# Altium PCB Tester_REV_0.PcbDoc (part 3 of 3)
Units mm, origin at the board's own origin, x right, y up, seen from the top; angles counter-clockwise.
Board outline 150 x 150 mm, 2 copper layers (Top Layer, Bottom Layer); 109 components, 101 nets, 433 pads, 87 vias.
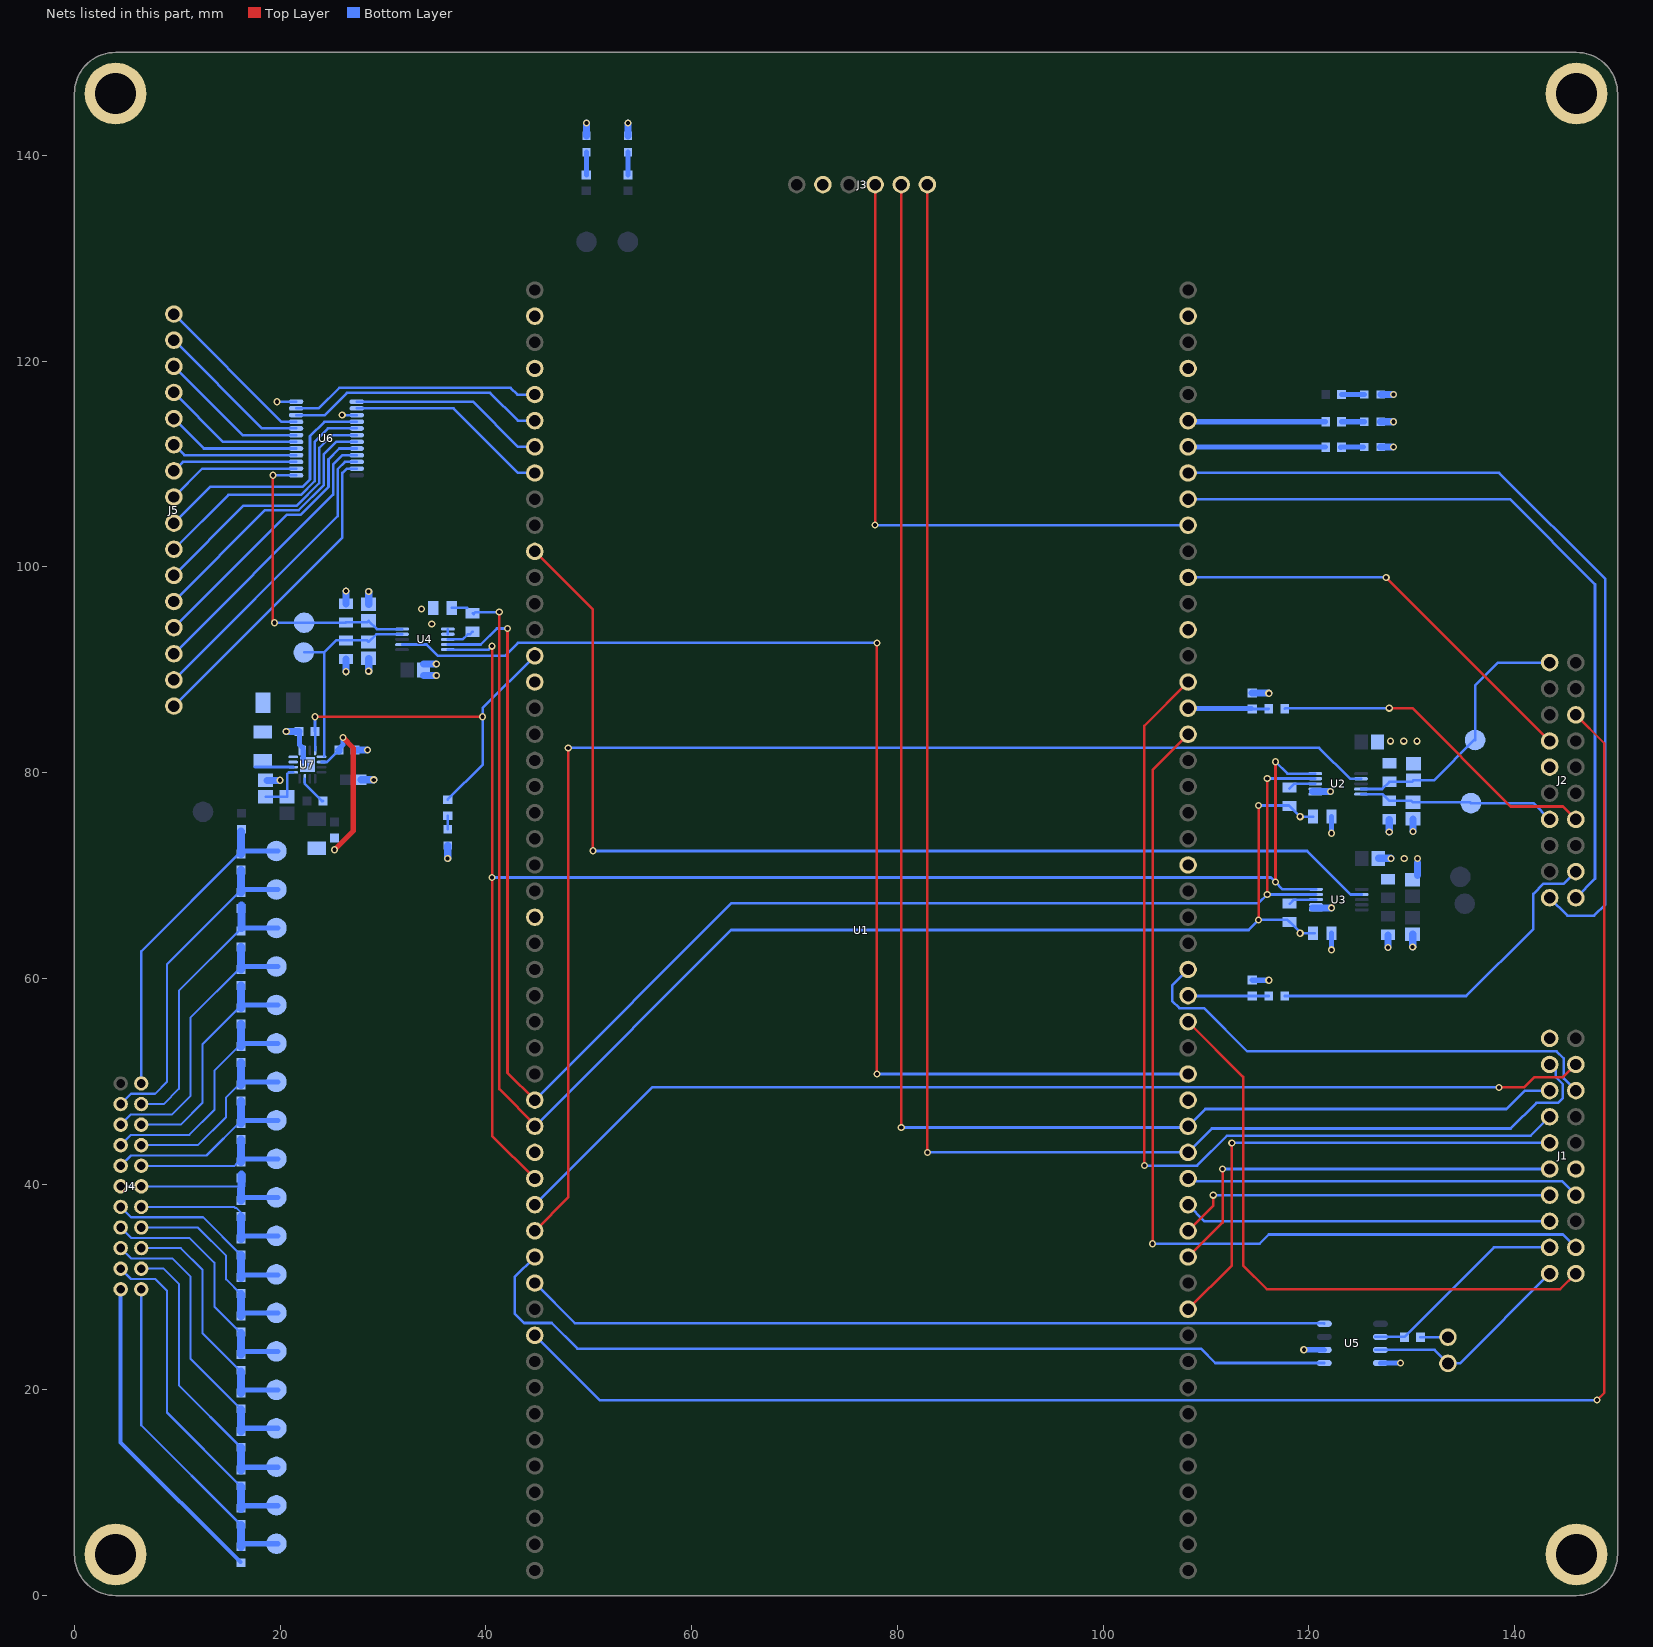
[diagram p2: the nets of this part, all layers, seen from the top]

## Via types
v1: diameter 0.7, hole 0.4, Top Layer to Bottom Layer, 87 vias

## Nets (pads, with @x,y where several pads share a name; then routed paths per layer and width w, separated by ;. In a path a pad name is that pad's centre, name@x,y a point inside that pad or via, vN(x,y) a via of type N, cw(c..) or ccw(c..) an arc to the next point about the centre after c; other vN are vias at no path point) (continued)
BMS_TEMP: C9.2 R16.2 TEMP.1 U4.5 U6.1 | length 32.3
  Top Layer w0.25: v1(19.3,108.895) 19.3,94.724 v1(19.464,94.56)
  Bottom Layer w0.25: v1(19.3,108.895) U6.1@21.55,108.895 ; TEMP.1@22.335,94.56 v1(19.464,94.56) 26.369,94.56 R16.2@26.404,94.595 28.454,94.595 C9.2@28.604,94.745 29.405,93.944 U4.5@31.85,93.944
BMS_VOLT: C8.1 R15.1 U4.4 U7.13 VOLT.1 | length 20.5
  Bottom Layer w0.25: VOLT.1@22.335,91.7 24.3,91.7 ; U7.13@24.3,81.6 24.3,91.7 ; U4.4@31.85,93.444 29.353,93.444 C8.1@28.604,92.695 28.454,92.845 R15.1@26.404,92.845 25.445,92.845 24.3,91.7
BRAKE_LIGHT: R1.2 R3.1 U1.67 | length 7.8
  Bottom Layer w0.25: R1.2@114.479,86.175 116.064,86.175 R3.1@116.089,86.2
  Bottom Layer w0.5: U1.67@108.251,86.24 R1.2@114.415,86.24
BSE: BSE.1 C5.2 J2.14 R12.2 U2.5 | length 19.4
  Bottom Layer w0.25: U2.5@125.062,77.9 127.156,77.9 R12.2@127.807,77.249 129.957,77.249 C5.2@130.107,77.099 135.678,77.099 BSE.1@135.743,77.034 141.813,77.034 J2.14@143.397,75.45
BSPD_FLT: J1.10 U1.79 | length 59.8
  Top Layer w0.25: U1.79@108.251,55.78 113.6,50.431 113.6,32.1 115.921,29.779 144.412,29.779 J1.10@145.937,31.305
BUZZER: R2.2 R4.1 U1.78 | length 7.8
  Bottom Layer w0.25: U1.78@108.251,58.28 R2.2@114.479,58.28 R4.1@116.089,58.28
CAN_H: "120 OHM.1" J1.11 U5.7 | length 21.1
  Bottom Layer w0.25: U5.7@126.444,23.88 132.198,23.88 133.5,22.578 134.671,22.578 J1.11@143.397,31.305
CAN_L: J1.12 R17.1 U5.6 | length 20.6
  Bottom Layer w0.25: U5.6@126.444,25.15 129.279,25.15 137.973,33.845 J1.12@143.397,33.845
CAN_RX: U1.39 U5.4 | length 78.4
  Bottom Layer w0.25: U1.39@44.751,30.38 48.656,26.475 121.494,26.475 U5.4@121.494,26.42
CAN_TX: U1.38 U5.1 | length 87
  Bottom Layer w0.25: U1.38@44.751,32.92 42.8,30.97 42.8,27.4 43.7,26.5 46.4,26.5 48.9,24 109.5,24 110.89,22.61 U5.1@121.494,22.61
CELL1: CELL1.1 J4.1 R40.1 R41.2 | length 32.6
  Bottom Layer w0.25: J4.1@6.5,29.779 6.5,16.56 R40.1@16.2,6.859
  Bottom Layer w0.5: R41.2@16.25,5.04 CELL1.1@19.767,5.04
  Bottom Layer w0.8: R41.2@16.2,4.74 R40.1@16.2,6.859
CELL2: CELL2.1 J4.21 R39.1 R40.2 | length 33.1
  Bottom Layer w0.2: J4.21@4.5,31.779 5.5,30.779 7.844,30.779 9,29.624 9,17.8 R39.1@16.2,10.6
  Bottom Layer w0.5: R40.2@16.25,8.735 CELL2.1@19.767,8.735
  Bottom Layer w0.8: R40.2@16.2,8.435 R40.2@16.2,8.481 R39.1@16.2,10.6
CELL3: CELL3.1 J4.2 R38.1 R39.2 | length 28.4
  Bottom Layer w0.2: J4.2@6.5,31.779 8.677,31.779 10.15,30.306 10.15,20.45 R38.1@16.2,14.4
  Bottom Layer w0.5: R39.2@16.25,12.476 CELL3.1@19.767,12.476
  Bottom Layer w0.8: R39.2@16.2,12.176 R39.2@16.2,12.221 R38.1@16.2,14.4
CELL4: CELL4.1 J4.20 R37.1 R38.2 | length 28.5
  Bottom Layer w0.2: J4.20@4.5,33.779 5.5,32.779 9.509,32.779 11.3,30.989 11.3,23 R37.1@16.2,18.1
  Bottom Layer w0.5: R38.2@16.25,16.262 CELL4.1@19.767,16.262
  Bottom Layer w0.8: R38.2@16.2,15.962 R37.1@16.2,18.1
CELL5: CELL5.1 J4.3 R36.1 R37.2 | length 23.9
  Bottom Layer w0.2: J4.3@6.5,33.779 10.342,33.779 12.45,31.672 12.45,25.509 R36.1@16.2,21.759
  Bottom Layer w0.5: R37.2@16.25,20.003 CELL5.1@19.767,20.003
  Bottom Layer w0.8: R37.2@16.2,19.703 R36.1@16.2,21.759
CELL6: CELL6.1 J4.19 R35.1 R36.2 | length 24
  Bottom Layer w0.2: J4.19@4.5,35.779 5.5,34.779 11.175,34.779 13.6,32.354 13.6,28.1 R35.1@16.2,25.5
  Bottom Layer w0.5: R36.2@16.25,23.744 CELL6.1@19.767,23.744
  Bottom Layer w0.8: R36.2@16.2,23.444 R35.1@16.2,25.5
CELL7: CELL7.1 J4.4 R34.1 R35.2 | length 19.4
  Bottom Layer w0.2: J4.4@6.5,35.779 12.008,35.779 14.75,33.037 14.75,30.75 R34.1@16.2,29.3
  Bottom Layer w0.5: R35.2@16.25,27.485 CELL7.1@19.767,27.485
  Bottom Layer w0.8: R35.2@16.2,27.185 R34.1@16.2,29.3
CELL8: CELL8.1 J4.18 R33.1 R34.2 | length 19.4
  Bottom Layer w0.2: J4.18@4.5,37.779 5.5,36.779 12.521,36.779 R33.1@16.2,33.1
  Bottom Layer w0.5: R34.2@16.25,31.18 CELL8.1@19.767,31.18
  Bottom Layer w0.8: R34.2@16.2,30.88 R34.2@16.2,30.925 R33.1@16.2,33.1
CELL9: CELL9.1 J4.5 R32.1 R33.2 | length 15.7
  Bottom Layer w0.2: J4.5@6.5,37.779 15.528,37.779 15.626,37.682 15.725,37.682 R32.1@16.25,37.157
  Bottom Layer w0.5: R33.2@16.25,34.966 CELL9.1@19.767,34.966
  Bottom Layer w0.8: R33.2@16.2,34.666 R32.1@16.2,36.857
CELL10: CELL10.1 J4.6 J4.17 R31.1 R32.2 | length 17.5
  Bottom Layer w0.2: J4.17@4.5,39.779 J4.6@6.5,39.779 ; J4.6@6.5,39.934 6.654,39.779 16.25,39.779
  Bottom Layer w0.5: R32.2@16.25,38.707 CELL10.1@19.767,38.707
  Bottom Layer w0.8: R32.2@16.2,38.407 16.2,39.479 ; 16.25,39.84 R31.1@16.25,40.898
CELL11: CELL11.1 J4.7 R30.1 R31.2 | length 16.1
  Bottom Layer w0.2: J4.7@6.5,41.779 15.581,41.779 R31.2@15.993,42.191 ; 15.736,41.934 R31.2@16.25,42.448
  Bottom Layer w0.5: R31.2@16.25,42.448 CELL11.1@19.767,42.448
  Bottom Layer w0.8: R31.2@16.2,42.148 R30.1@16.2,44.339
CELL12: CELL12.1 J4.16 R29.1 R30.2 | length 19.3
  Bottom Layer w0.2: J4.16@4.5,41.779 5.5,42.779 12.84,42.779 R30.2@16.25,46.189
  Bottom Layer w0.5: R30.2@16.25,46.189 CELL12.1@19.767,46.189
  Bottom Layer w0.8: R30.2@16.2,45.889 R29.1@16.2,48.079
CELL13: CELL13.1 J4.8 R28.1 R29.2 | length 19.1
  Bottom Layer w0.2: J4.8@6.5,43.779 12.008,43.779 14.75,46.522 14.75,48.43 R29.2@16.25,49.929
  Bottom Layer w0.5: R29.2@16.25,49.929 CELL13.1@19.767,49.929
  Bottom Layer w0.8: R29.2@16.2,49.629 R28.1@16.2,51.82
CELL14: CELL14.1 J4.15 R27.1 R28.2 | length 23.8
  Bottom Layer w0.2: J4.15@4.5,43.779 5.5,44.779 11.175,44.779 13.6,47.204 13.6,51.021 R28.2@16.25,53.67
  Bottom Layer w0.5: R28.2@16.25,53.67 CELL14.1@19.767,53.67
  Bottom Layer w0.8: R28.2@16.2,53.37 R27.1@16.2,55.561
CELL15: CELL15.1 J4.9 R26.1 R27.2 | length 23.6
  Bottom Layer w0.2: J4.9@6.5,45.779 10.342,45.779 12.45,47.887 12.45,53.611 R27.2@16.25,57.411
  Bottom Layer w0.5: R27.2@16.25,57.411 CELL15.1@19.767,57.411
  Bottom Layer w0.8: R27.2@16.2,57.111 R26.1@16.2,59.302
CELL16: CELL16.1 J4.14 R25.1 R26.2 | length 28.3
  Bottom Layer w0.2: J4.14@4.5,45.779 5.5,46.779 9.509,46.779 11.3,48.57 11.3,56.202 R26.2@16.25,61.152
  Bottom Layer w0.5: R26.2@16.25,61.152 CELL16.1@19.767,61.152
  Bottom Layer w0.8: R26.2@16.2,60.852 R25.1@16.2,63.043
CELL17: CELL17.1 J4.10 R24.1 R25.2 | length 28.1
  Bottom Layer w0.2: J4.10@6.5,47.779 8.677,47.779 10.15,49.253 10.15,58.793 R25.2@16.25,64.893
  Bottom Layer w0.5: R25.2@16.25,64.893 CELL17.1@19.767,64.893
  Bottom Layer w0.8: R25.2@16.25,64.893 R24.1@16.25,67.083
CELL18: CELL18.1 J4.13 R23.1 R24.2 | length 32.8
  Bottom Layer w0.2: J4.13@4.5,47.779 5.5,48.779 7.844,48.779 9,49.935 9,61.384 R24.2@16.25,68.633
  Bottom Layer w0.5: R24.2@16.25,68.633 CELL18.1@19.767,68.633
  Bottom Layer w0.8: R24.2@16.2,68.333 R23.1@16.2,70.524
CELL19: CELL19.1 J4.11 R22.1 R23.2 | length 32.3
  Bottom Layer w0.25: J4.11@6.5,49.779 6.5,62.624 R23.2@16.25,72.374
  Bottom Layer w0.5: R23.2@16.25,72.374 CELL19.1@19.767,72.374
  Bottom Layer w0.8: R23.2@16.2,72.074 R22.1@16.2,74.265
CURRENT_SENS: C4.1 ISNS.1 J2.20 R11.1 U2.4 | length 26.6
  Bottom Layer w0.25: U2.4@125.062,78.4 127.115,78.4 R11.1@127.813,79.099 129.999,79.099 C4.1@130.149,79.249 132.143,79.249 ISNS.1@136.143,83.249 ; ISNS.1@136.143,83.164 ISNS.1@136.143,83.249 ; J2.20@143.397,90.69 138.39,90.69 136.143,88.443 ISNS.1@136.143,83.249
EXTRA_HET: J1.2 U1.36 | length 106.8
  Top Layer w0.25: v1(138.473,49.4) 140.9,49.4 141.9,50.4 144.713,50.4 J1.2@145.937,51.625
  Bottom Layer w0.25: U1.36@44.751,38 56.15,49.4 v1(138.473,49.4)
FB: C15.1 R20.1 R21.2 U7.14 | length 15.9
  Top Layer w0.5: v1(25.276,72.5) 27.1,74.324 27.1,82.4 v1(26.1,83.4)
  Bottom Layer w0.25: U7.14@24.021,81.024 24.538,81.024 25.657,82.142 R21.2@25.715,82.201
  Bottom Layer w0.5: R21.2@25.715,82.084 25.657,82.142 25.6,82.199 26.1,82.699 v1(26.1,83.4)
  Bottom Layer w0.7: R21.2@25.715,82.084 R21.2@25.715,82.201
GND: C1.1 C2.1 C3.1 C4.2 C5.1 C6.2 C7.1 C8.2 C9.1 C10.1 C14.1 D1.2 D2.2 D3.2 D4.2 D5.2 D6.2 J1.6 J1.20 J2.16 J3.5 J4.22 pad.0 pad.2 pad.3 pad.4 R1.1 R2.1 R5.1 R6.1 R7.1 R11.2 R12.1 R13.2 R14.1 R15.2 R16.1 R18.1 R21.1 R41.1 U1.2 U1.4 U1.16 U1.25 U1.34 U1.52 U1.54 U1.64 U1.73 U1.82 U2.6 U2.7 U3.6 U3.7 U4.6 U4.7 U5.2 U5.8 U6.12 U6.15 U7.9 U7.10 U7.17 | length 80.8
  Bottom Layer w0.25: v1(19.7,116.045) U6.12@21.55,116.045 ; v1(26.027,114.745) U6.15@27.45,114.745
  Bottom Layer w0.254: R18.1@21.835,83.998 R18.1@21.896,83.937 ; U7.10@22.396,82.149 22.396,81.024 U7.17@22.646,80.774 ; U4.7@36.3,93.444 U4.6@36.3,93.944
  Bottom Layer w0.4: J4.22@4.5,29.779 4.5,14.9 R41.1@16.13,3.27
  Bottom Layer w0.5: R18.1@21.896,83.937 21.896,82.704 22.215,82.385 U7.17@22.215,81.146 ; R2.1@114.479,59.83 114.494,59.816 v1(116.1,59.816) ; v1(119.5,23.9) 121.473,23.9 U5.2@121.494,23.88 ; R7.1@122.194,75.714 122.197,75.71 v1(122.197,74.1) ; v1(122.197,62.771) R5.1@122.197,64.381 ; U5.8@126.944,22.61 126.953,22.6 v1(128.9,22.6)
  Bottom Layer w0.7: C14.1@18.721,79.243 v1@19.96,79.243 ; v1@20.596,83.998 R18.1@21.835,83.998 ; v1(26.405,89.805) R15.2@26.404,91.045 ; R16.1@26.404,96.395 v1(26.404,97.634) ; R21.1@27.265,82.201 v1(28.504,82.201) ; C10.1@27.86,79.293 v1(29.1,79.293) ; v1@28.604,89.856 C8.2@28.604,91.095 ; C9.1@28.604,96.345 v1(28.604,97.584) ; C3.1@33.94,89.445 v1(35.18,89.445) ; C3.1@33.941,90.545 v1(35.18,90.545) ; v1(36.285,71.66) D6.2@36.285,72.9 ; D2.2@49.78,141.9 v1@49.78,143.14 ; D1.2@53.8,141.9 v1@53.8,143.14 ; R1.1@114.479,87.725 v1@116.1,87.725 ; 120.344,66.849 v1(122.197,66.85) ; 120.344,78.149 v1(122.083,78.15) ; C2.1@126.744,71.663 v1@127.983,71.663 ; D5.2@126.981,111.63 v1@128.14,111.63 ; D3.2@126.981,114.095 v1(128.221,114.095) ; D4.2@127,116.755 v1(128.221,116.755) ; v1@127.678,62.986 R14.1@127.678,64.225 ; v1@127.807,74.21 R12.1@127.807,75.449 ; v1(130.079,63.035) C7.1@130.078,64.275 ; v1(130.108,74.259) C5.1@130.107,75.499 ; C6.2@130.543,70.009 130.543,71.249
  other v1: 127.679,62.985 127.984,71.652 129.263,71.652 130.543,71.652 127.808,74.209 19.975,79.252 127.934,83.052 129.213,83.052 130.493,83.052 20.596,83.997 116.1,87.7 28.605,89.855 34.741,94.445 33.75,95.909 128.221,111.63 49.779,143.14 53.799,143.14
HEARTBEAT: R46.2 U1.57 | length 13.4
  Bottom Layer w0.5: U1.57@108.251,111.63 R46.2@121.62,111.63
HV_ACTIVE: R18.2 R47.2 U1.15 U7.12 | length 37.2
  Top Layer w0.25: v1(23.385,85.42) v1(39.68,85.42)
  Bottom Layer w0.25: R18.2@23.385,83.998 v1(23.385,85.42) ; U7.12@23.396,82.149 R18.2@23.396,84.121 ; R47.2@36.285,77.36 39.68,80.755 v1(39.68,85.42) 39.68,86.269 U1.15@44.751,91.34
IMD: J1.3 U1.77 | length 47.7
  Bottom Layer w0.25: U1.77@108.251,60.86 106.7,59.31 106.7,57.8 107.4,57.1 109.8,57.1 114,52.9 144.068,52.9 144.762,52.205 144.762,51.133 144.768,51.127 144.768,50.254 J1.3@145.937,49.085
IMD_FLT: J1.9 U1.68 | length 93
  Top Layer w0.25: v1(104.8,34.2) 104.8,80.27 U1.68@108.251,83.72
  Bottom Layer w0.25: v1(104.8,34.2) 115.189,34.2 116.089,35.1 144.682,35.1 J1.9@145.937,33.845
INVERTER: J2.3 U1.41 | length 173.9
  Top Layer w0.25: J2.3@145.937,85.61 148.7,82.847 148.7,19.7 v1(148,19)
  Bottom Layer w0.25: U1.41@44.751,25.3 51.051,19 v1(148,19)
"MIBSPI1 CLK": U1.32 U2.9 U3.9 U4.9 | length 153.6
  Top Layer w0.25: v1(42.1,94) 42.1,50.811 U1.32@44.751,48.16 ; v1(115.944,68.149) v1(115.944,79.425)
  Bottom Layer w0.25: U4.9@36.3,92.444 39.5,92.444 41.056,94 v1(42.1,94) ; U1.32@44.751,48.16 63.89,67.3 115.094,67.3 v1(115.944,68.149) U3.9@120.683,68.15 ; v1(115.944,79.425) 120.587,79.425 U2.9@120.612,79.4
"MIBSPI1 MISO": R5.2 R6.2 R7.2 R8.1 R9.1 R10.1 U1.33 | length 157.2
  Top Layer w0.25: v1(41.3,95.6) 41.3,49.22 U1.33@44.9,45.62 ; v1(115.1,65.674) v1(115.1,76.8)
  Bottom Layer w0.25: R6.2@36.689,96.009 38.19,96.009 ; R9.1@38.704,95.495 38.799,95.4 38.999,95.6 v1(41.3,95.6) ; U1.33@44.751,45.62 63.83,64.7 114.126,64.7 v1(115.1,65.674) 117.908,65.674 R8.1@118.108,65.475 R8.1@118.143,65.475 ; v1(115.1,76.8) 118.021,76.8 R10.1@118.048,76.774 ; R8.1@118.068,65.549 R8.1@118.143,65.475 ; R10.1@118.108,76.749 v1(119.143,75.714) R7.2@120.394,75.714 ; R5.2@120.544,64.385 R5.2@120.394,64.385 119.233,64.385 R8.1@118.143,65.475
  other v1: 119.143,64.385
"MIBSPI1 MOSI": U1.35 U2.10 U3.10 U4.10 | length 154.5
  Top Layer w0.25: v1(40.6,92.286) 40.6,44.691 U1.35@44.751,40.54 ; v1(116.744,69.349) v1(116.744,81.049)
  Bottom Layer w0.25: U4.10@36.3,91.944 40.258,91.944 v1(40.6,92.286) ; v1(40.6,69.8) 116.293,69.8 v1(116.744,69.349) 117.443,68.65 U3.10@120.683,68.65 ; v1(116.744,81.049) 117.893,79.9 U2.10@120.612,79.9
"MIBSPI1 NCS_1": U1.11 U3.2 | length 107.9
  Top Layer w0.25: U1.11@44.751,101.5 50.4,95.851 v1(50.4,72.4)
  Bottom Layer w0.25: v1(50.4,72.4) 50.426,72.374 119.819,72.374 124.043,68.15 U3.2@125.133,68.15
"MIBSPI1 NCS_2": U1.81 U4.2 | length 119.3
  Top Layer w0.25: v1(78,50.7) v1(78,92.6)
  Bottom Layer w0.25: U4.2@31.85,92.444 34.24,92.444 35.34,91.344 41.844,91.344 43.1,92.6 v1(78,92.6) ; v1(78,50.7) U1.81@108.251,50.7
"MIBSPI1 NCS_5": U1.37 U2.2 | length 126.6
  Top Layer w0.25: U1.37@44.751,35.46 48,38.71 v1(48,82.4)
  Bottom Layer w0.25: v1(48,82.4) 120.993,82.4 123.993,79.4 U2.2@125.062,79.4
MUX_S0: U1.6 U6.10 | length 25.2
  Bottom Layer w0.25: U6.10@21.55,114.745 24.345,114.745 26.5,116.9 40.4,116.9 43.1,114.2 U1.6@44.751,114.2
MUX_S1: U1.5 U6.11 | length 24.3
  Bottom Layer w0.25: U6.11@21.55,115.395 23.741,115.395 25.745,117.4 42.4,117.4 43.06,116.74 U1.5@44.751,116.74
MUX_S2: U1.8 U6.14 | length 19.9
  Top Layer w0.25: U1.8@44.73,109.1 U1.8@44.751,109.12
  Bottom Layer w0.25: U6.14@27.45,115.395 36.865,115.395 43.14,109.12 U1.8@44.751,109.12
MUX_S3: U1.7 U6.13 | length 19.1
  Bottom Layer w0.25: U6.13@27.45,116.045 38.755,116.045 43.14,111.66 U1.7@44.751,111.66
NetC11_1: C11.1 U7.6 | length 3.7
  Bottom Layer w0.3: C11.1@17.575,80.524 U7.6@21.271,80.524
NetD1_1: D1.1 R42.1 | length 2.2
  Bottom Layer w0.5: R42.1@53.8,138.09 D1.1@53.8,140.3
NetD2_1: D2.1 R43.1 | length 2.2
  Bottom Layer w0.5: R43.1@49.764,138.09 49.78,138.105 D2.1@49.78,140.3
NetD3_1: D3.1 R44.1 | length 2.2
  Bottom Layer w0.5: R44.1@123.17,114.095 D3.1@125.381,114.095
NetD4_1: D4.1 R45.1 | length 2.2
  Bottom Layer w0.5: R45.1@123.19,116.763 R45.1@123.205,116.748 ; R45.1@123.205,116.755 D4.1@125.4,116.755
NetD5_1: D5.1 R46.1 | length 2.2
  Bottom Layer w0.5: R46.1@123.09,111.613 R46.1@123.124,111.648 ; R46.1@123.124,111.63 D5.1@125.3,111.63
NetD6_1: D6.1 R47.1 | length 1.3
  Bottom Layer w0.25: D6.1@36.285,74.5 R47.1@36.285,75.81
NetJ2_7: J2.7 R3.2 | length 32.8
  Top Layer w0.25: v1(127.808,86.26) 130.04,86.26 139.6,76.7 144.687,76.7 J2.7@145.937,75.45
  Bottom Layer w0.25: R3.2@117.639,86.2 117.698,86.26 v1(127.808,86.26)
NetJ2_9: J2.9 R4.2 | length 35.3
  Bottom Layer w0.25: R4.2@117.639,58.28 135.28,58.28 141.813,64.813 141.813,68.213 142.795,69.195 143.884,69.195 143.889,69.2 144.768,69.2 J2.9@145.937,70.37
NetJP29_2: "120 OHM.2" R17.2 | length 2.7
  Bottom Layer w0.25: R17.2@130.839,25.118 133.5,25.118
NetR8_2: R8.2 U3.8 | length 2.7
  Bottom Layer w0.25: R8.2@118.143,67.249 118.544,67.65 U3.8@120.683,67.65
NetR9_2: R9.2 U4.8 | length 2.7
  Bottom Layer w0.25: U4.8@36.3,92.944 37.74,92.944 38.24,93.444 38.453,93.444 R9.2@38.704,93.695
NetR10_2: R10.2 U2.8 | length 2.7
  Bottom Layer w0.25: R10.2@118.108,78.449 118.559,78.9 U2.8@120.612,78.9
NetR19_1: R19.1 U7.3 | length 3
  Bottom Layer w0.25: U7.3@22.396,79.399 22.396,78.9 24.06,77.236 R19.1@24.169,77.236
RTD: J2.17 U1.62 | length 41.7
  Top Layer w0.25: v1(127.504,98.964) J2.17@143.397,83.07
  Bottom Layer w0.25: U1.62@108.251,98.96 108.254,98.964 v1(127.504,98.964)
SCL: J2.11 U1.58 | length 83
  Bottom Layer w0.25: U1.58@108.251,109.12 138.48,109.12 148.8,98.8 148.8,67.175 147.725,66.1 145.127,66.1 J2.11@143.397,67.83
SDA: J2.10 U1.59 | length 74.2
  Bottom Layer w0.25: U1.59@108.251,106.58 139.52,106.58 147.8,98.3 147.8,69.692 J2.10@145.937,67.83
SPI3_CLK: J1.15 U1.88 | length 41.8
  Top Layer w0.25: U1.88@108.251,32.92 111.6,36.27 v1(111.6,41.465)
  Bottom Layer w0.25: v1@111.6,41.6 111.735,41.465 J1.15@143.397,41.465
SPI3_CS: J1.16 U1.90 | length 48.9
  Top Layer w0.25: U1.90@108.251,27.84 112.5,32.09 v1@112.5,44
  Bottom Layer w0.25: v1@112.5,44.1 112.595,44.005 J1.16@143.397,44.005
  other v1: 112.5,44.005
SPI3_MISO: J1.13 U1.86 | length 35.8
  Bottom Layer w0.25: U1.86@108.251,38 109.866,36.385 J1.13@143.397,36.385
SPI3_MOSI: J1.14 U1.87 | length 37.2
  Top Layer w0.25: U1.87@108.251,35.46 110.7,37.91 v1(110.7,38.925)
  Bottom Layer w0.25: v1@110.7,39 110.775,38.925 J1.14@143.397,38.925
SW: C11.2 L1.2 U7.7 U7.8
TEMP_1: J5.1 U6.9 | length 16.2
  Bottom Layer w0.25: J5.1@9.669,124.565 20.138,114.095 U6.9@21.55,114.095
TEMP_2: J5.2 U6.8 | length 15.4
  Bottom Layer w0.25: J5.2@9.669,122.025 18.248,113.445 U6.8@21.55,113.445
TEMP_3: J5.3 U6.7 | length 14.7
  Bottom Layer w0.25: J5.3@9.669,119.485 16.358,112.795 U6.7@21.55,112.795
TEMP_4: J5.4 U6.6 | length 13.9
  Bottom Layer w0.25: J5.4@9.669,116.945 14.468,112.145 U6.6@21.55,112.145
TEMP_5: J5.5 U6.5 | length 13.1
  Bottom Layer w0.25: J5.5@9.669,114.405 12.578,111.495 U6.5@21.55,111.495
TEMP_6: J5.6 U6.4 | length 12.3
  Bottom Layer w0.25: J5.6@9.669,111.865 10.688,110.845 U6.4@21.55,110.845
TEMP_7: J5.7 U6.3 | length 12.2
  Bottom Layer w0.25: J5.7@9.669,109.325 10.539,110.195 U6.3@21.55,110.195
TEMP_8: J5.8 U6.2 | length 13
  Bottom Layer w0.25: J5.8@9.669,106.785 12.429,109.545 U6.2@21.55,109.545
TEMP_9: J5.16 U6.23 | length 31
  Bottom Layer w0.25: J5.16@9.669,86.465 26.05,102.846 26.05,109.116 26.48,109.545 U6.23@27.45,109.545
TEMP_10: J5.15 U6.22 | length 29.2
  Bottom Layer w0.25: J5.15@9.669,89.005 25.6,104.936 25.6,109.5 26.295,110.195 U6.22@27.45,110.195
TEMP_11: J5.14 U6.21 | length 27.5
  Bottom Layer w0.25: J5.14@9.669,91.545 25.15,107.026 25.15,109.945 26.05,110.845 U6.21@27.45,110.845
TEMP_12: J5.13 U6.20 | length 26.6
  Bottom Layer w0.25: J5.13@9.669,94.085 20.634,105.05 21.996,105.05 24.7,107.754 24.7,110.45 25.745,111.495 U6.20@27.45,111.495
TEMP_13: J5.12 U6.19 | length 26
  Bottom Layer w0.25: J5.12@9.669,96.625 18.544,105.5 21.809,105.5 24.25,107.941 24.25,110.95 25.445,112.145 U6.19@27.45,112.145
TEMP_14: J5.11 U6.18 | length 25.4
  Bottom Layer w0.25: J5.11@9.669,99.165 16.454,105.95 21.623,105.95 23.8,108.127 23.8,111.55 25.045,112.795 U6.18@27.45,112.795
TEMP_15: J5.10 U6.17 | length 24.9
  Bottom Layer w0.25: J5.10@9.669,101.705 14.964,107 22.036,107 23.35,108.314 23.35,112.15 24.645,113.445 U6.17@27.45,113.445
TEMP_16: J5.9 U6.16 | length 24.3
  Bottom Layer w0.25: J5.9@9.669,104.245 13.224,107.8 22.2,107.8 22.9,108.5 22.9,112.7 24.295,114.095 U6.16@27.45,114.095
TSAL: J1.17 U1.66 | length 90.1
  Top Layer w0.25: v1(104,41.8) 104,84.55 U1.66@108.251,88.8
  Bottom Layer w0.25: v1(104,41.8) 109.12,41.8 112.02,44.7 141.553,44.7 J1.17@143.397,46.545
UART_RX: J1.18 J3.2 U1.83 | length 156.4
  Top Layer w0.25: v1(80.371,45.5) J3.2@80.371,137.149 ; U1.83@107.971,45.5 108.171,45.7 U1.83@108.251,45.62
  Bottom Layer w0.25: v1@80.4,45.74 80.4,45.5 U1.83@107.971,45.5 ; U1.83@108.251,45.62 109.93,47.3 139.2,47.3 140.985,49.085 J1.18@143.397,49.085
UART_TX: J1.19 J3.1 U1.84 | length 161.8
  Top Layer w0.25: v1@82.911,43.27 J3.1@82.911,137.049
  Bottom Layer w0.25: v1(82.911,43.08) U1.84@108.251,43.08 110.57,45.4 139.6,45.4 142.1,47.9 144.2,47.9 144.682,48.382 144.682,49.704 144,50.386 144,51.022 J1.19@143.397,51.625 ; v1@82.911,43.27 v1@83.1,43.08
VCU_FLT_OUT: J1.7 U1.85 | length 38.5
  Bottom Layer w0.25: U1.85@108.251,40.54 108.251,40.29 144.572,40.29 J1.7@145.937,38.925
VCU_MODE: R44.2 U1.56 | length 13.4
  Bottom Layer w0.5: U1.56@108.251,114.095 R44.2@121.62,114.095
VCU_RST: J3.3 U1.60 | length 63.5
  Top Layer w0.25: J3.3@77.831,137.149 v1(77.831,104.071) v1@77.861,104.04
  Bottom Layer w0.25: v1@77.861,104.04 U1.60@108.251,104.04
VOUT1: C13.1 C14.2 U7.5 | length 5
  Bottom Layer w0.25: C14.2@18.59,77.653 20.663,77.653 C13.1@20.673,77.643 20.673,79.838 20.859,80.024 U7.5@21.271,80.024
pads on no net: J1.1 J1.4 J1.5 J2.1 J2.2 J2.4 J2.5 J2.6 J2.8 J2.15 J2.18 J2.19 J3.4 U1.9 U1.10 U1.12 U1.13 U1.14 U1.17 U1.18 U1.19 U1.20 U1.21 U1.22 U1.23 U1.24 U1.26 U1.27 U1.28 U1.29 U1.30 U1.31 U1.40 U1.42 U1.43 U1.44 U1.45 U1.46 U1.47 U1.48 U1.49 U1.50 U1.61 U1.63 U1.65 U1.70 U1.71 U1.72 U1.74 U1.75 U1.76 U1.80 U1.89 U1.91 U1.92 U1.93 U1.94 U1.95 U1.96 U1.97 U1.98 U1.99 U1.100 U7.1 U7.2 U7.16

## Polygon pours and split planes (outlines as drawn)
GND on Top Layer "Bottom Layer-GND" (solid, remove dead copper, pour order 12): 1,4 ccw(c4,4) 4,1 146,1 ccw(c146,4) 149,4 149,146 ccw(c146,146) 146,149 4,149 ccw(c4,146) 1,146
Batt_Volt on Bottom Layer "Bottom Layer-Batt_Volt" (solid, pour order 20): 25.715,75.4 15.7,75.4 15.7,76.8 21.3,76.8 21.917,78.549 25.715,76.289
GND on Bottom Layer "Top Layer-GND" (solid, pour order 14): 36.941,93.345 36.941,95.145 35.365,96.72 33.341,96.72 33.341,94.703 34.699,93.345
SW on Bottom Layer "Top Layer-SW" (solid, pour order 16): 21.775,80.8 21.775,81.7 19.575,83.9 19.575,87.8 17.275,87.8 17.275,83.2 18.275,83.2 20.675,80.8
5V on Bottom Layer "Top Layer-5V 2" (solid, remove dead copper, pour order 0): 30.141,93.145 33.041,93.145 33.041,87.145 30.141,87.145
FB on Bottom Layer "Top Layer-FB" (solid, pour order 18): 22.6,72.025 22.6,74.05 26.05,74.05 26.05,72.025
5V on Bottom Layer "Top Layer-5V 1" (solid, remove dead copper, pour order 2): 124.344,83.949 126.844,83.949 126.844,78.649 124.344,78.649
5V on Bottom Layer "Top Layer-5V" (solid, remove dead copper, pour order 4): 124.409,72.649 126.744,72.649 126.744,67.349 124.409,67.349
GND on Bottom Layer "Top Layer-GND 2" (solid, remove dead copper, pour order 6): 131.044,72.349 131.044,68.949 126.144,68.949 126.144,72.349
GND on Bottom Layer "Top Layer-GND 1" (solid, remove dead copper, pour order 8): 130.994,83.749 130.994,80.249 126.094,80.249 126.094,83.749

## Other copper
Top Layer:
  pour cut-out: 106,39.2 105.9,39.1 104.8,39.1 104.8,80.27 108.251,83.72 108.251,81.18 106,78.93
  pour cut-out: 119.7,126.8 119.68,126.78 119.68,121.72 120.6,120.8 121.1,121.3 121.1,125.7

## Silkscreen, mask and mechanical layers (free items; w line width, h text height)
Top Overlay:
  lines w0.1: 31.299,86 31.3,86
  lines w0.2: 110.6,89.6 136.3,89.6 138.8,87.1 138.8,74.4 142.2,74.4 ; 141.9,45.3 137.8,45.3 136.6,44.1 136.6,36.5 137.8,35.3 142,35.3 ; 144.7,28.4 144.7,39.7 145.2,40.2 149,40.2 ; 147,70.8 147.8,71.6 147.8,74 ; 147,75.8 147.8,76.6 147.8,80 ; 147,85.9 147.7,86.6 147.7,91.2
  text "RX" at 81.07,133.398 h1 r90
  text "TX" at 83.61,133.398 h1 r90
  text "12V" at 70.91,132.565 h1 r90
  text "GND" at 73.45,132.399 h1 r90
  text "VCU RST" at 78.53,128.4 h1 r90
  text "TEMP16" at 11.2,123.865 h1
  text "TEMP15" at 11.2,121.325 h1
  text "TEMP14" at 11.2,118.785 h1
  text "TEMP13" at 11.2,116.245 h1
  text "TEMP12" at 11.2,113.705 h1
  text "TEMP11" at 11.5,111.165 h1
  text "TEMP10" at 11.2,108.625 h1
  text "TEMP9" at 12,106.085 h1
  text "TEMP8" at 12,103.545 h1
  text "TEMP7" at 12,101.005 h1
  text "TEMP6" at 12,98.465 h1
  text "TEMP5" at 12,95.925 h1
  text "TEMP4" at 12,93.385 h1
  text "TEMP3" at 12,90.845 h1
  text "VCU mode DAC out is BSE / BMS mode DAC out is ISNS" at 110.2,90 h1
  text "CRNT SENSE" at 137.1,90 h1
  text "TEMP2" at 12,88.305 h1
  text "TEMP1" at 12.3,85.765 h1
  text "INVERTER" at 149.462,85.51 h1 r90
  text "In VCU mode ensure HV active pin (GIOB0) is LOW so HV is not present on board" at 46.6,85.1 h1
  text "RTD" at 139.1,82.408 h1
  text "BRAKE" at 149.462,76.31 h1 r90
  text "BSE" at 139.3,74.708 h1
  text "APPS2" at 137.073,72.198 h1
  text "APPS1" at 137.434,69.738 h1
  text "BUZZER" at 149.462,69.4 h1 r90
  text "SCL" at 139,67.278 h1
  text "SDA" at 146.9,67.178 h1
  text "VCU / / BMS MASTER" at 133.1,59.016 h1.6
  text "1" at 62,52 h30
  text "HET" at 146.89,50.885 h1
  text "TX" at 139.89,50.86 h1
  text "20" at 1.3,49.08 h1
  text "19" at 7.7,49.08 h1
  text "RX" at 139.89,48.345 h1
  text "IMD" at 146.9,48.315 h1
  text "18" at 1.5,47.08 h1
  text "17" at 7.7,47.08 h1
  text "TSAL" at 138.1,45.855 h1
  text "16" at 1.5,45.08 h1
  text "15" at 7.7,45.08 h1
  text "CS" at 139.9,43.295 h1
  text "14" at 1.5,43.1 h1
  text "13" at 7.7,43.08 h1
  text "12" at 1.5,41.08 h1
  text "11" at 8.1,41.08 h1
  text "CLK" at 138.9,40.835 h1
  text "10" at 1.5,39.08 h1
  text "10" at 7.7,39.08 h1
  text "MOSI" at 138.2,38.275 h1
  text "VCU" at 146.9,38.175 h1
  text "8" at 2.3,37.116 h1
  text "9" at 8.5,37.08 h1
  text "SPI 3 in VCU mode acts as HV votlage sense  / SPI 3 in BMS mode acts as Thermistor Exp" at 111.8,36.42 h1
  text "MISO" at 138.1,35.7 h1
  text "BMS" at 147,35.615 h1
  text "6" at 2.3,35.08 h1
  text "7" at 8.6,35.08 h1
  text "CANL" at 138.1,33.155 h1
  text "IMD" at 147,33.155 h1
  text "5" at 8.5,33.08 h1
  text "4" at 2.3,33.07 h1
  text "2" at 2.3,31.08 h1
  text "3" at 8.5,31.08 h1
  text "CANH" at 137.9,30.595 h1
  text "GND" at 0.3,29.08 h1
  text "1" at 8.9,29.08 h1
  text "BSPD" at 145.7,28.695 h1
  text "FAULTS" at 143.7,26.743 h1
Bottom Overlay:
  drawing of 27 lines, arcs and shapes, not listed
  text "5V" at 48.679,143.8 h1.6 r270
  text "12V" at 52.699,143.7 h1.6 r270
  text "3" at 41,137.6 h7
  text "VCU / BMS TEST BOARD REV 0" at 137.55,134.19 h2
  text "RX" at 79.63,133.398 h1 r270
  text "TX" at 82.19,133.398 h1 r270
  text "12V" at 69.5,132.565 h1 r270
  text "GND" at 72.05,132.399 h1 r270
  text "JAROD" at 74.61,130.399 h1 r270
  text "12V not needed if only testing VCU" at 67.6,128.7 h1
  text "VCU RST" at 77.17,128.4 h1 r270
  text "TEMP16" at 17.1,123.865 h1
  text "BMS TEMPERATURE" at 37.5,122.8 h1.6
  text "TEMP15" at 17.1,121.325 h1
  text "TEMP14" at 17.1,118.785 h1
  text "TEMP13" at 17.1,116.245 h1
  text "BMS MODE" at 143.45,115.69 h1.6
  text "LAUNCHPAD USB THIS WAY" at 87.65,115.079 h1.6
  text "TEMP12" at 17.1,113.705 h1
  text "VCU MODE" at 143.45,113.115 h1.6
  text "TEMP11" at 17.1,111.165 h1
  text "HEARTBEAT" at 143.45,110.541 h1.6
  text "TEMP10" at 17.1,108.625 h1
  text "TEMP9" at 17.1,106.085 h1
  text "TEMP8" at 17.1,103.545 h1
  text "TEMP7" at 17.1,101.005 h1
  text "TEMP6" at 17.1,98.465 h1
  text "TEMP5" at 17.1,95.925 h1
  text "TEMP4" at 17.1,93.385 h1
  text "INVERTER" at 149.342,93.19 h1 r90
  text "TEMP3" at 17.1,90.845 h1
  text "VCU mode DAC out is BSE / BMS mode DAC out is ISNS" at 133.7,90.022 h1
  text "CRNT SENSE" at 142.11,90.022 h1
  text "TEMP2" at 17.1,88.305 h1
  text "TEMP1" at 17.1,85.765 h1
  text "RTD" at 142.2,82.415 h1
  text "BRAKE" at 148.08,76.38 h1 r270
  text "BSE" at 142.31,74.667 h1
  text "APPS2" at 142.209,72.22 h1
  text "HV ACTIVE" at 34.2,70.389 h1 r270
  text "APPS1" at 142.176,69.76 h1
  text "BUZZER" at 148.06,69.29 h1 r270
  text "SCL" at 142.11,67.216 h1
  text "SDA" at 150.01,67.165 h1
  text "BMS VOLTAGE" at 12.6,66.6 h1.6
  text "VCU / / BMS MASTER" at 149.2,59 h1.6
  text "HIGH / VOLTAGE" at 38.07,56.125 h1.75
  text "1" at 87.972,52 h30
  text "HET" at 149.91,50.885 h1
  text "TX" at 142.01,50.86 h1
  text "20" at 3.4,49.08 h1
  text "19" at 9.6,49.08 h1
  text "RX" at 141.91,48.36 h1
  text "IMD" at 149.81,48.32 h1
  text "18" at 3.4,47.08 h1
  text "17" at 9.6,47.08 h1
  text "TSAL" at 142.21,45.86 h1
  text "16" at 3.4,45.08 h1
  text "15" at 9.6,45.08 h1
  text "OVER V --" at 34.1,44.817 h1
  text "CS" at 142.01,43.3 h1
  text "14" at 3.4,43.08 h1
  text "13" at 9.6,43.08 h1
  text "12" at 3.4,41.08 h1
  text "11" at 9.6,41.08 h1
  text "CLK" at 142.01,40.84 h1
  text "10" at 3.4,39.08 h1
  text "10" at 9.6,39.08 h1
  text "MOSI" at 141.91,38.28 h1
  text "VCU" at 150.01,38.18 h1
  text "8" at 3.4,37.08 h1
  text "9" at 9.6,37.08 h1
  text "SPI 3 in VCU mode acts as HV votlage sense  / SPI 3 in BMS mode acts as Thermistor Exp" at 136.4,36.42 h1
  text "MISO" at 142.01,35.72 h1
  text "BMS" at 150.01,35.62 h1
  text "6" at 3.4,35.08 h1
  text "7" at 9.6,35.08 h1
  text "CANL" at 142.11,33.16 h1
  text "IMD" at 149.91,33.16 h1
  text "4" at 3.4,33.08 h1
  text "5" at 9.6,33.08 h1
  text "2" at 3.4,31.08 h1
  text "3" at 9.6,31.08 h1
  text "CANH" at 142.01,30.6 h1
  text "GND" at 3.4,29.08 h1
  text "1" at 9.6,29.08 h1
  text "BSPD" at 149.71,28.7 h1
  text "FAULTS" at 149.7,26.743 h1
  text "UNDER V --" at 34.438,19.269 h1
  text "DO  / NOT / TOUCH" at 37.73,6.204 h1.75
  text "z" at 86,1.2 h4
BoardOutline:
  the board outline again, w0.1